# Altium PCB expansion.PcbDoc
Units mil, origin at the board's own origin, x right, y up, seen from the top; angles counter-clockwise.
Board outline 912.08 x 872.97 mil, 2 copper layers (Top Layer, Bottom Layer), stack 18.8 mil thick; 6 components, 7 nets, 64 pads, 0 vias.
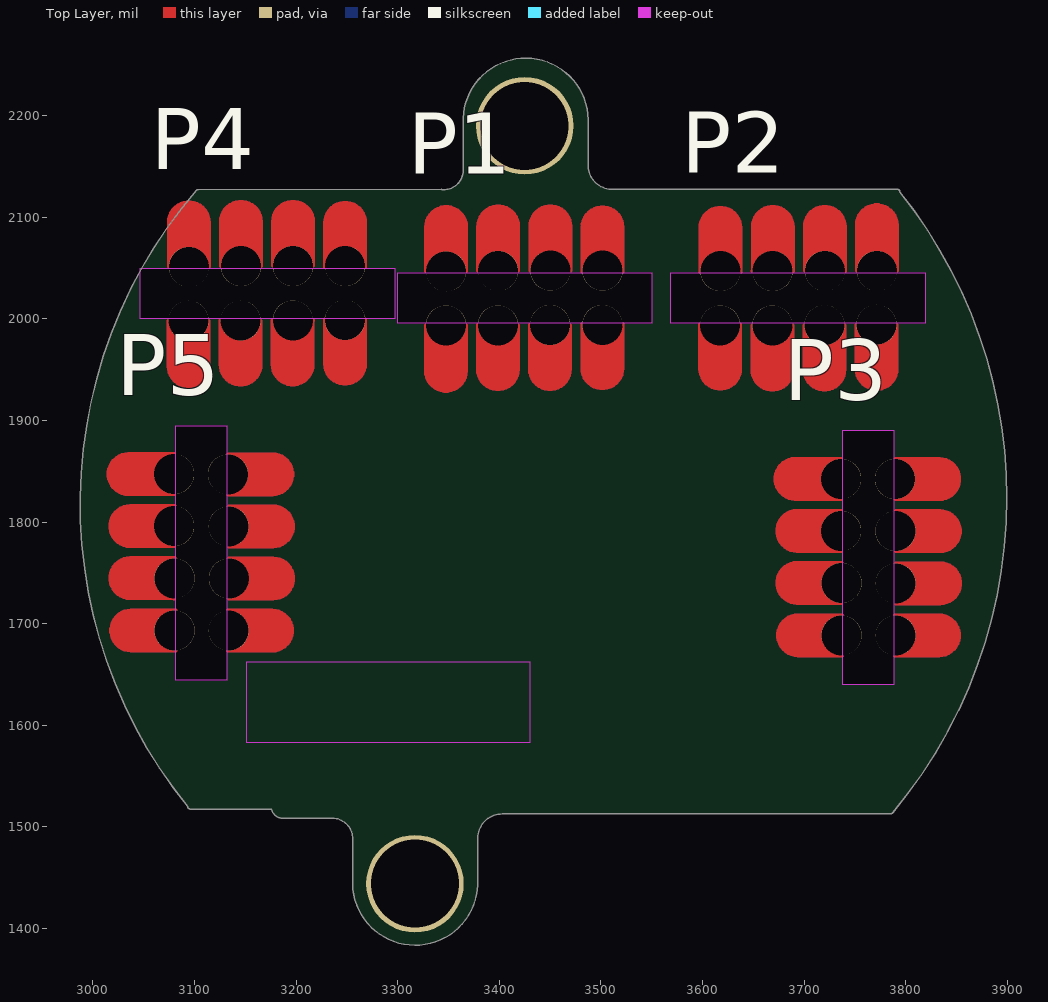
[diagram p0: Top Layer view]
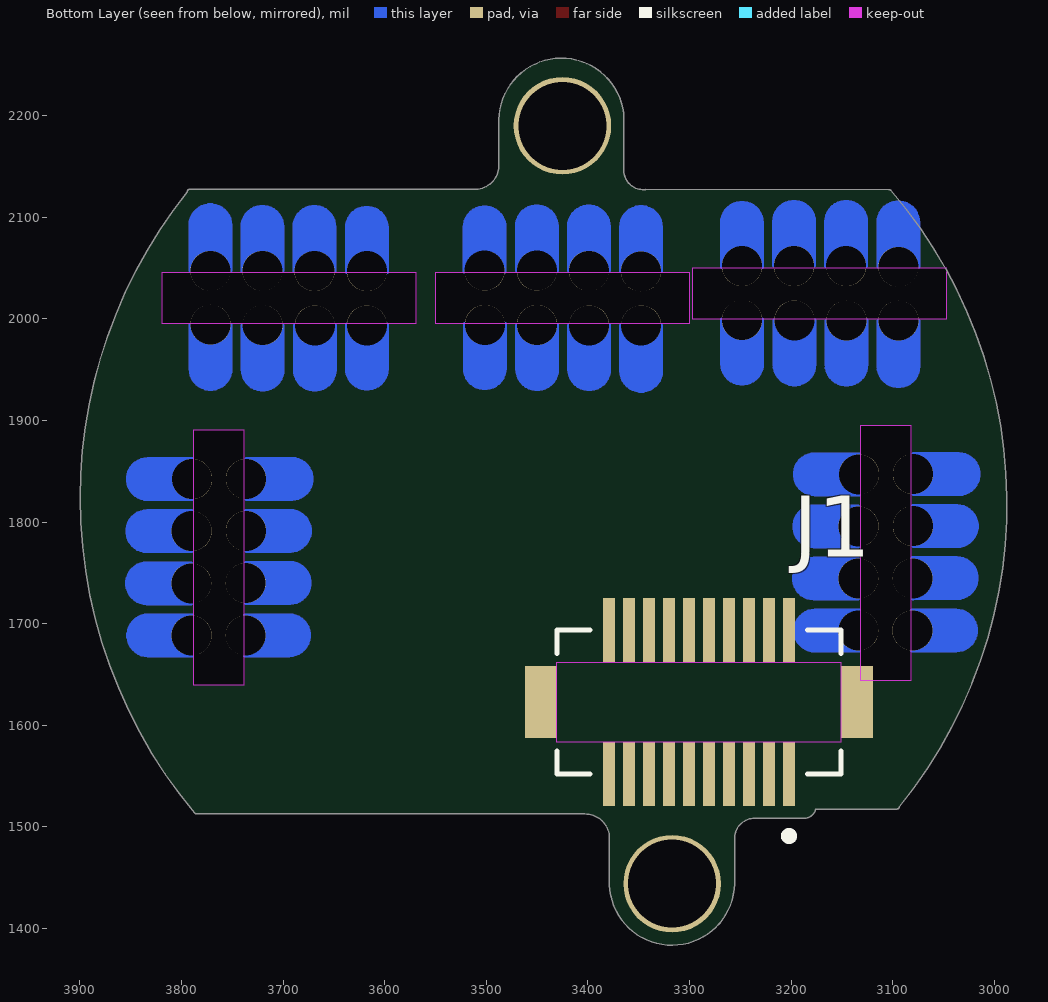
[diagram p1: Bottom Layer view, seen from below]

## Layer stack, top to bottom
Top Solder: solder mask 0.4, Solder Resist, Dk 3.5
Top Layer: signal copper 1.4
Dielectric 1: core 3, FR-4, Dk 4.2
Dielectric 3: prepreg 5, Dk 4.2
Dielectric 2: core 8, Dk 4.2
Bottom Layer: signal copper 1.4
Bottom Solder: solder mask 0.4, Solder Resist, Dk 3.5

## Board outline
3187,1508.48 3234,1508.48 ccw(c3234,1511) 3234.17,1508.49 cw(c3235.55,1488.45) 3255.59,1489.91 3255.59,1444 ccw(c3258.11,1444) 3255.6,1443.88 cw(c3317.09,1445.02) 3255.59,1444.02 cw(c3257.72,1444.06) 3255.59,1444.06 3255.6,1443.88 ccw(c3317.16,1445.01) 3378.69,1442.78 ccw(c3376.32,1442.99) 3378.7,1443 3378.7,1488.99 cw(c3402.69,1488.69) 3402.97,1512.68 ccw(c3403,1516.21) 3403,1512.68 3785,1512.68 ccw(c3785,1515.2) 3787.04,1513.73 ccw(c3785.33,1515.39) 3787.16,1513.86 ccw(c3416.39,1823.74) 3899.61,1823.74 ccw(c3416.39,1823.74) 3794.27,2124.92 ccw(c3792.62,2124.98) 3794.27,2125 ccw(c3791.76,2125) 3791.76,2127.51 3512,2127.51 ccw(c3511.99,2125.49) 3511.88,2127.51 cw(c3511.01,2150.99) 3487.53,2150.1 ccw(c3485.13,2150.01) 3487.51,2150.35 3487.51,2195 ccw(c3485.03,2195) 3487.46,2195.48 ccw(c3485.03,2196) 3487.51,2196 ccw(c3486.9,2196.01) 3487.51,2196.04 ccw(c3425.95,2195.05) 3364.42,2197.3 ccw(c3366.91,2197) 3364.41,2197 3364.41,2144.08 ccw(c3366.92,2144.08) 3364.43,2143.72 cw(c3345.4,2146.4) 3343.3,2127.3 cw(c3343.29,2127.33) 3343.28,2127.3 3343.3,2127.3 ccw(c3343.01,2124.9) 3343,2127.32 3103.63,2127.29 ccw(c3103.61,2124.78) 3101.71,2126.42 ccw(c3460.67,1818.11) 3093.33,1519.84 ccw(c3095.84,1520) 3095.84,1517.48 3175.76,1517.48 ccw(c3187,1520)

## Design rules (kind name [scope] priority, off if disabled: settings)
Clearance [All] p1: gap=5 ignorepadtopadclearanceinfootprint=FALSE except(0: Arc-Hole Track-Hole SMDPad-Hole THPad-Hole Via-Hole Fill-Hole Poly-Hole Region-Hole Text-Hole; 6: Track-SMDPad)
MinimumSolderMaskSliver [All] p1 off: minsoldermaskwidth=5
PolygonConnect [All] p1: connectstyle=Direct reliefconductorwidth=10 reliefentries=4 polygonreliefangle="90 Angle" airgapwidth=10
RoomDefinition expansion [InComponentClass('expansion')] p1: confinementstyle=ConfineIn formatcopy=TRUE lockcomponents=FALSE outline 0,0 2000,0 2000,1000 0,1000
RoutingVias [All] p1: holewidth=8 width=18 viastyle="Through Hole" minholewidth=8 minwidth=18 maxholewidth=28 maxwidth=50
SilkToSilkClearance [All] p1 off: silktosilkclearance=10
SilkToSolderMaskClearance [IsPad] p1 off: minsilkscreentomaskgap=10 clearancetoexposedcopper=TRUE
SolderMaskExpansion [All] p1: expansion=4 istentingtop=FALSE
Width [All] p1: maxlimit=50 minlimit=5 preferedwidth=5
27 further rules are at their usual default settings.

## Components (designator, comment, footprint, x,y, rotation, side; value= is the part's Value field where it differs from the comment)
J1 "DF12NB(3.0)-20DS-0.5V(51)" HRS_DF12NB(3.0)-20DS-0.5V(51) 3290.58,1622.87 r180 bottom
P1 "vertical_4pos_conn" vertical_4pos_conn 3347.48,1993.29 r90 top
P2 "vertical_4pos_conn" vertical_4pos_conn 3771.52,2047.71 r270 top
P3 "vertical_4pos_conn" vertical_4pos_conn 3736.04,1842.49 r0 top
P4 "vertical_4pos_conn" vertical_4pos_conn 3094.24,1997.86 r90 top
P5 "vertical_4pos_conn" vertical_4pos_conn 3079.61,1847.18 r0 top

## Footprints (in the part's own frame and the unit in brackets; to place one, negate y for a bottom-side part, rotate by r counter-clockwise, add the part's x,y. Pads: shape width x height; smd on the part's side, far side on the other; paste and mask are expansions set on the pad)
HRS_DF12NB(3.0)-20DS-0.5V(51) [mm]
  rect 0.3x1.6 smd paste-2 mask+0.05: 1(2.25,-1.8) 2(2.25,1.8) 3(1.75,-1.8) 4(1.75,1.8) 5(1.25,-1.8) 6(1.25,1.8) 7(0.75,-1.8) 8(0.75,1.8) 9(0.25,-1.8) 10(0.25,1.8) 11(-0.25,-1.8) 12(-0.25,1.8) 13(-0.75,-1.8) 14(-0.75,1.8) 15(-1.25,-1.8) 16(-1.25,1.8) 17(-1.75,-1.8) 18(-1.75,1.8) 19(-2.25,-1.8) 20(-2.25,1.8)
  rect 0.8x1.8 smd: S1(3.95,0) S2(-3.95,0)
  Keep-Out Layer region: 3.55,-1 -3.55,-1 -3.55,1 3.55,1
  silkscreen extent -3.55,-3.45 3.55,1.8, body extent -4.06,-2.28 4.04,2.32, height 2.2
vertical_4pos_conn [mm]
  round 1 hole 1: 1(0.01,0) 1(1.356,-0.005) 2(0.01,-1.3) 2(1.371,-1.308) 3(0.018,-2.604) 3(1.375,-2.61) 4(0.02,-3.91) 4(1.373,-3.913)
  Keep-Out Layer board cut-out: 0.055,1.21 1.325,1.21 1.325,-5.15 0.055,-5.15
  Multi-Layer region: 2.483,-2.11 2.7,-2.16 2.874,-2.298 2.971,-2.499 2.971,-2.721 2.874,-2.922 2.7,-3.061 2.483,-3.11 2.483,-3.11 1.383,-3.11 1.383,-2.11
  Multi-Layer region: -1.088,-1.8 -1.305,-1.75 -1.479,-1.612 -1.575,-1.411 -1.575,-1.189 -1.479,-0.988 -1.305,-0.85 -1.088,-0.8 -1.088,-0.8 0.002,-0.8 0.002,-1.8
  Multi-Layer region: -1.13,-0.5 -1.347,-0.45 -1.521,-0.312 -1.617,-0.111 -1.617,0.111 -1.521,0.312 -1.347,0.45 -1.13,0.5 -1.13,0.5 0.002,0.5 0.002,-0.5
  Multi-Layer region: -1.065,-4.41 0.037,-4.41 0.037,-3.41 -1.065,-3.41 -1.282,-3.46 -1.456,-3.598 -1.552,-3.799 -1.552,-4.021 -1.456,-4.222 -1.282,-4.36 -1.065,-4.41
  Multi-Layer region: -1.085,-3.104 -1.302,-3.054 -1.476,-2.916 -1.572,-2.715 -1.572,-2.493 -1.476,-2.292 -1.302,-2.154 -1.085,-2.104 -1.085,-2.104 0.01,-2.104 0.01,-3.104
  Multi-Layer region: 2.479,-0.808 2.696,-0.857 2.87,-0.996 2.966,-1.197 2.966,-1.419 2.87,-1.62 2.696,-1.758 2.479,-1.808 2.479,-1.808 1.379,-1.808 1.379,-0.808
  Multi-Layer region: 2.456,-3.413 1.356,-3.413 1.356,-4.413 2.456,-4.413 2.673,-4.364 2.847,-4.225 2.943,-4.025 2.943,-3.802 2.847,-3.602 2.673,-3.463 2.456,-3.413
  Multi-Layer region: 2.464,0.495 2.681,0.446 2.855,0.307 2.951,0.107 2.951,-0.116 2.855,-0.316 2.681,-0.455 2.464,-0.505 2.464,-0.505 1.364,-0.505 1.364,0.495
  Multi-Layer lines w0.1: -1.14,-0.5 0.002,-0.5 0.002,0.5 -1.13,0.5 ccw(c-1.13,0) -1.13,-0.5 ; 0.002,-0.8 0.002,-1.8 -1.098,-1.8 ; 0.012,-0.8 -1.088,-0.8 ccw(c-1.088,-1.3) -1.088,-1.8 ; 0.015,-2.1 -1.085,-2.1 ccw(c-1.085,-2.6) -1.085,-3.1 ; 0.01,-2.104 0.01,-3.104 ; -1.095,-3.1 0.005,-3.1 ; 0.035,-3.41 -1.065,-3.41 ccw(c-1.065,-3.91) -1.065,-4.41 0.035,-4.41 ; 0.037,-3.41 0.037,-4.41 ; 1.364,0.495 2.464,0.495 cw(c2.464,-0.005) 2.464,-0.505 1.364,-0.505 1.364,0.495 ; 1.379,-0.808 1.379,-1.808 2.479,-1.808 ccw(c2.479,-1.308) 2.479,-0.808 1.379,-0.808 ; 1.383,-2.11 1.383,-3.11 2.483,-3.11 ccw(c2.483,-2.61) 2.483,-2.11 1.383,-2.11 ; 1.356,-3.413 1.356,-4.413 2.456,-4.413 ccw(c2.456,-3.913) 2.456,-3.413 1.356,-3.413

## Part data
J1: Package=None, Availability=Unavailable, MP=DF12NB(3.0)-20DS-0.5V(51), Price=None

## Free pads (board coordinates)
  round 96 hole 86.61: 1(3317,1444) 1(3425,2190)

## Nets (pads, with @x,y where several pads share a name; then routed paths per layer and width w, separated by ;. In a path a pad name is that pad's centre, name@x,y a point inside that pad or via, vN(x,y) a via of type N, cw(c..) or ccw(c..) an arc to the next point about the centre after c; other vN are vias at no path point)
GND: J1.2
RESET: J1.19
SCL: J1.11
SDA: J1.13
SWCLK: J1.17
SWDIO: J1.15
VCC: J1.9
pads on no net: J1.1 J1.3 J1.4 J1.5 J1.6 J1.7 J1.8 J1.10 J1.12 J1.14 J1.16 J1.18 J1.20 J1.S1 J1.S2 P1.1 P1.2 P1.3 P1.4 P2.1 P2.2 P2.3 P2.4 P3.1 P3.2 P3.3 P3.4 P4.1 P4.2 P4.3 P4.4 P5.1 P5.2 P5.3 P5.4

## Silkscreen, mask and mechanical layers (free items; w line width, h text height)
Mechanical 1:
  lines w4: 3095.84,1520 3178,1520 ccw(c3187,1520) 3187,1511 3234,1511 cw(c3235.55,1488.45) 3258.11,1490 3258.11,1444 ; 3095.84,1520.74 cw(c3460.68,1818.11) 3103.61,2124.78 3343,2124.8 ccw(c3345.4,2146.4) 3367,2144 ; 3258.11,1444.06 ccw(c3317.16,1445.01) 3376.18,1443.11 ; 3366.92,2144.08 3366.92,2197 ; 3366.93,2196.95 cw(c3425.95,2195.05) 3485,2196 ; 3376.18,1443 3376.18,1491 ; 3376.18,1489 cw(c3402.69,1488.69) 3403,1515.2 3658,1515.2 3785,1515.2 ; 3484.99,2195 3484.99,2150.02 ccw(c3511.01,2150.99) 3512,2125 3791.76,2125 ; 3785.23,1515.48 ccw(c3416.39,1823.74) 3791.76,2124.03
Mechanical 2:
  lines w7.87: 3044,1601 3044,1629 3063,1617 3044,1601
Mechanical 4:
  lines w5: 3259,1724 3260,1663
Mechanical 15:
  circle w10: c3445,1820 r472.44
  circle w3.94: c3314,1444 r69.88
  circle w3.94: c3425,2190 r69.88
  circle w5: c3425.98,2186.89 r39.37
  circle w5: c3317.13,1458.11 r39.37